# Altium PCB ECE8873_sample.PcbDoc
Units mm, origin at the board's own origin, x right, y up, seen from the top; angles counter-clockwise.
Board outline 17.79 x 10.55 mm, 2 copper layers (Top Layer, Bottom Layer); 4 components, 6 nets, 83 pads, 6 vias.
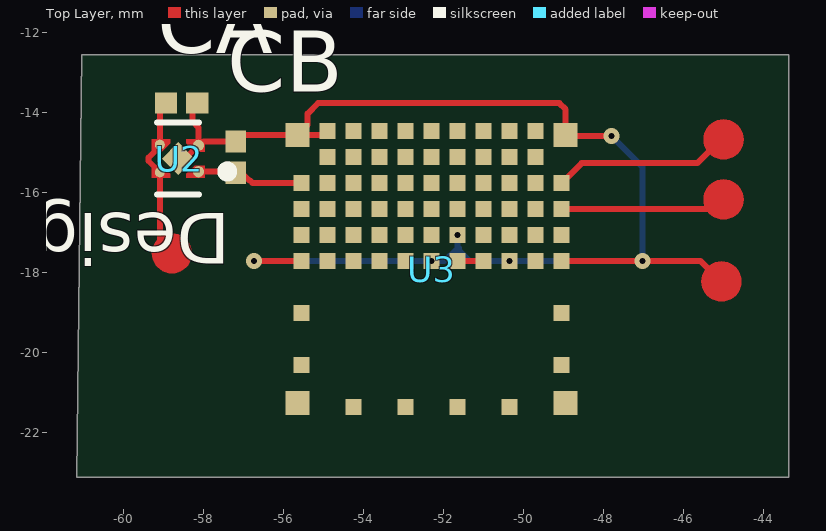
[diagram p0: Top Layer view]
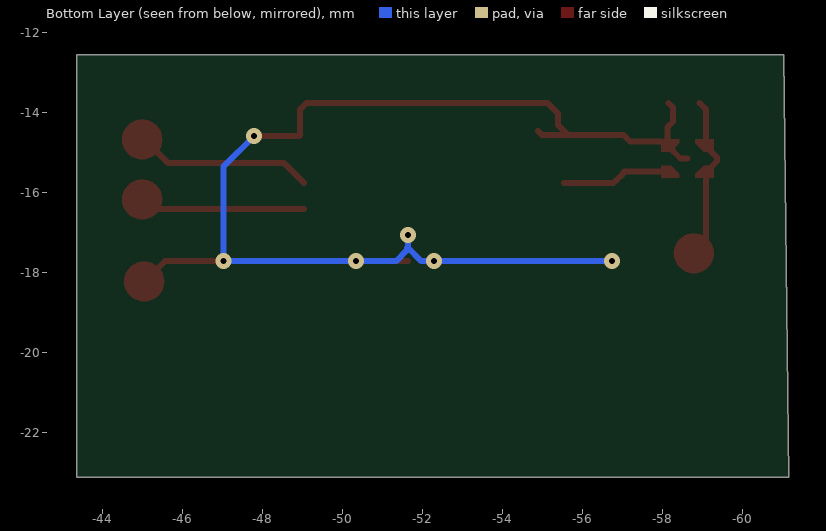
[diagram p1: Bottom Layer view, seen from below]
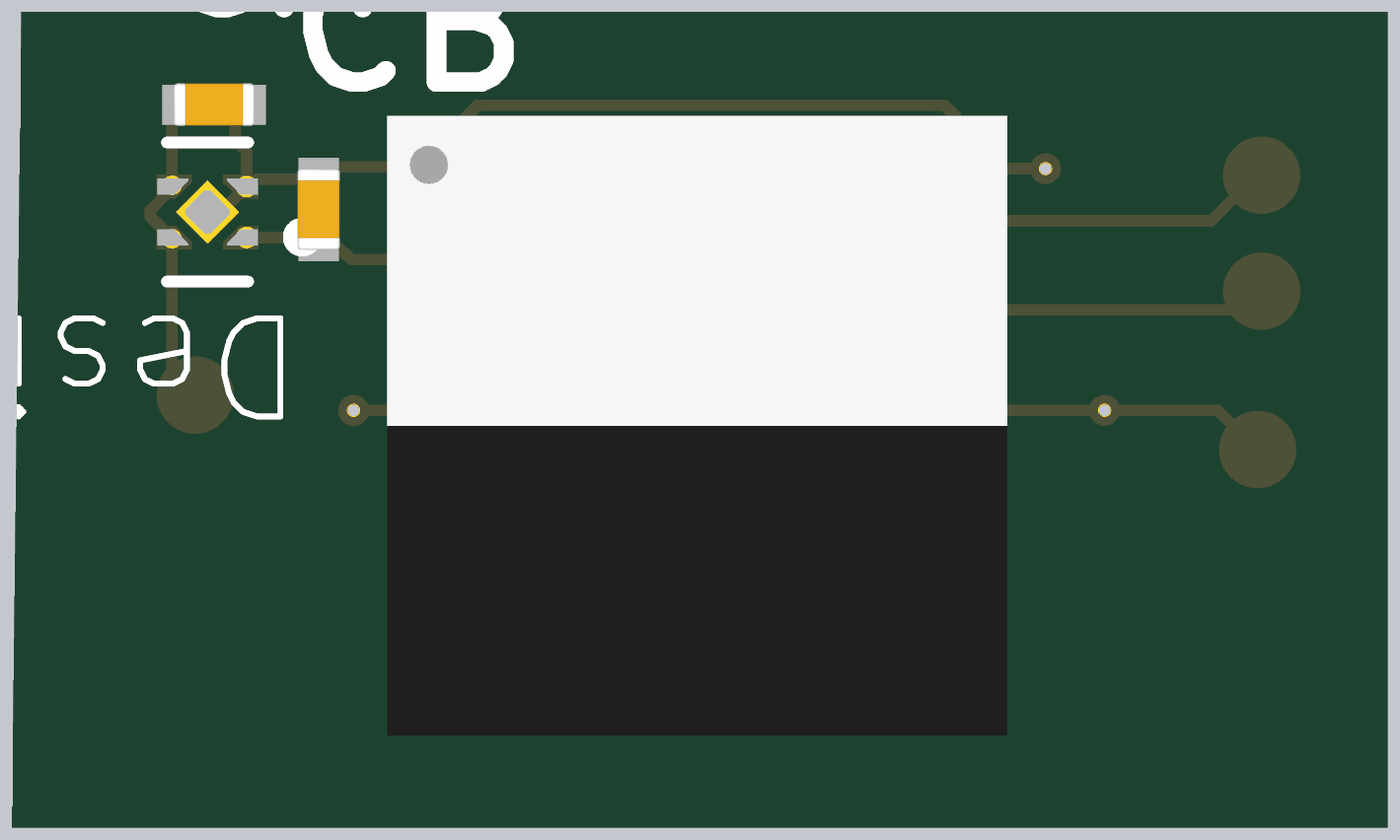
[diagram p2: 3D render of the assembled board from above, using the file's embedded part models]

## Layer stack, top to bottom
Top Solder: solder mask 0.0102, Solder Resist, Dk 3.5
Top Layer: signal copper 0.0356
Dielectric 1: dielectric 0.32, FR-4, Dk 4.8
Bottom Layer: signal copper 0.0356
Bottom Solder: solder mask 0.0102, Solder Resist, Dk 3.5

## Board outline
-61.161,-23.109 -43.368,-23.109 -43.368,-12.556 -61.038,-12.556

## Design rules (kind name [scope] priority, off if disabled: settings)
BoardOutlineClearance [All] p1: gap=0.2 ignorepadtopadclearanceinfootprint=FALSE
Clearance [All] p1: gap=0.12 ignorepadtopadclearanceinfootprint=TRUE
ComponentClearance [All] p1: gap=0.127 collisioncheckmode=3 verticalgap=0.127 showdistances=TRUE
DiffPairsRouting [All] p1: maxlimit=0.254 minlimit=0.127 mostfreqgap=0.127 toplayer_minwidth=0.127 toplayer_maxwidth=25.4 toplayer_prefwidth=0.127 bottomlayer_minwidth=0.127 bottomlayer_maxwidth=25.4 bottomlayer_prefwidth=0.127 maxuncoupledlength=12.7
Height [All] p1: minheight=0 maxheight=1816.048 prefheight=12.7
HoleSize [All] p1: absolutevalues=TRUE maxlimit=6.3 minlimit=0.15 maxpercent=80.000 minpercent=20.000
HoleToHoleClearance [All] p1: gap=0.254 allowstackedmicrovias=FALSE
MinimumAnnularRing [All] p1: minimumring=0.1
MinimumSolderMaskSliver [All] p1: minsoldermaskwidth=0.15
PlaneClearance [All] p1: clearance=0.127
PlaneConnect PlaneConnectPowerPads [InPadClass('PowerPads')] p1: planeconnectstyle=Direct reliefexpansion=0.508 reliefentries=4 reliefconductorwidth=0.254 reliefairgap=0.254
PlaneConnect [All] p2: pad.planeconnectstyle=Relief pad.reliefexpansion=0.3 pad.reliefentries=4 pad.reliefconductorwidth=0.127 pad.reliefairgap=0.127 via.planeconnectstyle=Direct via.reliefexpansion=0.3 via.reliefentries=4 via.reliefconductorwidth=0.127 via.reliefairgap=0.127
PolygonConnect PolygonConnectPowerPads [All vs (InPadClass('PowerPads'))] p1: connectstyle=Direct reliefconductorwidth=0.254 reliefentries=4 polygonreliefangle="90 Angle" airgapwidth=0.254
PolygonConnect [All] p2: thpad.connectstyle=Relief thpad.reliefconductorwidth=0.127 thpad.reliefentries=4 thpad.polygonreliefangle="90 Angle" thpad.airgapwidth=0.127 smdpad.connectstyle=Relief smdpad.reliefconductorwidth=0.127 smdpad.reliefentries=4 smdpad.polygonreliefangle="90 Angle" smdpad.airgapwidth=0.127 via.connectstyle=Direct via.reliefconductorwidth=0.127 via.reliefentries=4 via.polygonreliefangle="90 Angle" via.airgapwidth=0.127
RoutingVias [All] p1: holewidth=0.3 width=0.6 viastyle="Through Hole" minholewidth=0.3 minwidth=0.6 maxholewidth=0.6 maxwidth=6.6
SilkToSilkClearance [All] p1: silktosilkclearance=0.127
SilkToSolderMaskClearance [IsPad] p1: minsilkscreentomaskgap=0.127 clearancetoexposedcopper=TRUE
SolderMaskExpansion SolderMaskExpansion_1 [IsVia] p1: expansion=0.102 istentingtop=TRUE
SolderMaskExpansion [All] p2: expansion=0 istentingtop=FALSE
SupplyNets "Schematic Supply Nets" [InNet('GND')] p1: voltage=0.000
UnRoutedNet [All] p1: checkbadconnections=TRUE
Width Width_10mil [All] p1: maxlimit=25.4 minlimit=0.15 preferedwidth=0.15 minimp=50.000000 maximp=50.000000 favimp=50.000000
Width Width_6mil [All] p2: maxlimit=25.4 minlimit=0.152 preferedwidth=0.152 minimp=50.000000 maximp=50.000000 favimp=50.000000
Width Power_20mil [All] p3: maxlimit=25.4 minlimit=0.508 preferedwidth=0.508 minimp=50.000000 maximp=50.000000 favimp=50.000000
Width Power_12mil [All] p4: maxlimit=25.4 minlimit=0.305 preferedwidth=0.305 minimp=50.000000 maximp=50.000000 favimp=50.000000
Width Width_5mil [All] p5: maxlimit=25.4 minlimit=0.127 preferedwidth=0.127 minimp=50.000000 maximp=50.000000 favimp=50.000000
19 further rules are at their usual default settings.

## Components (designator, comment, footprint, x,y, rotation, side; value= is the part's Value field where it differs from the comment)
CA "Capacitor 1 uF +/- 10% 6.3 V 0402" CAPC1005X55X25LL05T10 -58.546,-13.755 r180 top value=1µF
CB "Capacitor 1 uF +/- 10% 6.3 V 0402" CAPC1005X55X25LL05T10 -57.193,-15.109 r270 top value=1µF
U2 "TPS7A0230PDQNR" DQN0004A-MFG -58.63,-15.144 r180 top
U3 "ISP1807" ISP2053-AX -52.297,-17.91 r0 top

## Footprints (in the part's own frame and the unit in brackets; to place one, negate y for a bottom-side part, rotate by r counter-clockwise, add the part's x,y. Pads: shape width x height; smd on the part's side, far side on the other; paste and mask are expansions set on the pad)
CAPC1005X55X25LL05T10 [mm] "Chip Capacitor, 2-Leads, Body 1.05x0.55mm, IPC High Density"
  rect 0.56x0.52 smd: 1(-0.39,0) 2(0.39,0)
  body extent -0.53,-0.28 0.53,0.28, height 0.55
DQN0004A-MFG [mm]
  round 0.279 smd paste-0.127: 1(-0.505,0.33) 2(-0.505,-0.33)
  round 0.251 smd paste-0.113: 3(0.459,-0.346) 4(0.459,0.346)
  rect 0.58x0.58 smd rot 135 paste-0.277: 5(0,0)
  Top Layer region: -0.66,0.175 -0.66,0.485 -0.2,0.485 -0.2,0.385 -0.41,0.175
  Top Layer region: 0.66,-0.175 0.66,-0.485 0.2,-0.485 0.2,-0.385 0.41,-0.175
  Top Layer region: 0.66,0.175 0.66,0.485 0.2,0.485 0.2,0.385 0.41,0.175
  Top Layer region: -0.66,-0.175 -0.66,-0.485 -0.2,-0.485 -0.2,-0.385 -0.41,-0.175
  silkscreen extent -1.35,-0.9 0.52,0.9
ISP2053-AX [mm] "Insight SiP BLE module all pins"
  rect 0.6x0.6 smd: A1(-3.35,3.35) A11(3.35,3.35) L1(-3.35,-3.35) L11(3.35,-3.35)
  rect 0.4x0.4 smd: A2(-2.6,3.45) A3(-1.95,3.45) A4(-1.3,3.45) A5(-0.65,3.45) A6(0,3.45) A7(0.65,3.45) A8(1.3,3.45) A9(1.95,3.45) A10(2.6,3.45) B2(-2.6,2.8) B3(-1.95,2.8) B4(-1.3,2.8) B5(-0.65,2.8) B6(0,2.8) B7(0.65,2.8) B8(1.3,2.8) B9(1.95,2.8) B10(2.6,2.8) C1(-3.25,2.15) C2(-2.6,2.15) C3(-1.95,2.15) C4(-1.3,2.15) C5(-0.65,2.15) C6(0,2.15) C7(0.65,2.15) C8(1.3,2.15) C9(1.95,2.15) C10(2.6,2.15) C11(3.25,2.15) D1(-3.25,1.5) D2(-2.6,1.5) D3(-1.95,1.5) D4(-1.3,1.5) D5(-0.65,1.5) D6(0,1.5) D7(0.65,1.5) D8(1.3,1.5) D9(1.95,1.5) D10(2.6,1.5) D11(3.25,1.5) E1(-3.25,0.85) E2(-2.6,0.85) E3(-1.95,0.85) E4(-1.3,0.85) E5(-0.65,0.85) E6(0,0.85) E7(0.65,0.85) E8(1.3,0.85) E9(1.95,0.85) E10(2.6,0.85) E11(3.25,0.85) F1(-3.25,0.2) F2(-2.6,0.2) F3(-1.95,0.2) F4(-1.3,0.2) F5(-0.65,0.2) F6(0,0.2) F7(0.65,0.2) F8(1.3,0.2) F9(1.95,0.2) F10(2.6,0.2) F11(3.25,0.2) H1(-3.25,-1.1) H11(3.25,-1.1) K1(-3.25,-2.4) K11(3.25,-2.4) L3(-1.95,-3.45) L5(-0.65,-3.45) L7(0.65,-3.45) L9(1.95,-3.45)
  body extent -4.01,-4.01 4.01,4.01, height 0.59

## Part data
CA CB: library part CMP-001-00008-6, "Chip Capacitor, 1 uF, +/- 10%, 6.3 V, 0402 (1005 Metric)", Capacitor Type=Ceramic, Case/Package=0402, Max Operating Temperature=85°C, Min Operating Temperature=-55°C, Tolerance=10%, Voltage Rating=6.3V, Mounting Technology=SM, Pins=2, RoHS Compliant=True
U2: "No Description Available", Mfr_Name="Texas Instruments", RefDes=RefDes, TYPE=TYPE
U3: library part ISP2053_Pinout_New, "ISP Smart Bluetooth Module", BOI="QFN 8 x 8", BOI-Metric="QFN 8 x 8", DESIG="BLE Module", FAB="Insight SiP", ISP_PART=ISP1807

## Via types
v1: diameter 0.4, hole 0.15, Top Layer to Bottom Layer, tented both sides, 6 vias

## Nets (pads, with @x,y where several pads share a name; then routed paths per layer and width w, separated by ;. In a path a pad name is that pad's centre, name@x,y a point inside that pad or via, vN(x,y) a via of type N, cw(c..) or ccw(c..) an arc to the next point about the centre after c; other vN are vias at no path point)
GND: CA.1 CB.1 U2.2 U2.5 U3.A1 U3.A2 U3.A11 U3.E7 U3.F1 U3.F6 U3.F9 U3.F11 | length 33.4
  Top Layer w0.15: U2.5 -58.455,-15.144 U2.2 ; CA.1 -58.271,-13.87 -58.271,-14.219 -58.125,-14.365 U2.2 ; v1(-56.742,-17.711) -55.548,-17.711 U3.F1 ; U3.A2 -54.997,-14.56 U3.A1 ; U3.F11 v1(-47.028,-17.71) -45.568,-17.71 -45.068,-18.21 ; v1(-47.793,-14.583) -48.924,-14.583 U3.A11 -48.947,-13.917 -49.102,-13.762 -55.135,-13.762 -55.397,-14.024 -55.397,-14.31 U3.A1 ; U2.2 -58.09,-14.814 -57.995,-14.719 CB.1 -57.034,-14.56 U3.A1
  Bottom Layer w0.15: v1(-56.742,-17.711) -56.741,-17.71 v1(-52.297,-17.71) -51.976,-17.71 -51.647,-17.381 v1(-51.647,-17.06) ; -51.616,-17.381 -51.616,-17.439 -51.345,-17.71 v1(-50.347,-17.71) v1(-47.028,-17.71) -47.028,-15.348 v1(-47.793,-14.583)
N$4: U3.F7 U3.F8 | length 0.7
  Top Layer w0.15: U3.F7 U3.F8
SWDCLK_1: U3.D11 | length 4.1
  Top Layer w0.15: U3.D11 -45.276,-16.41 -45.037,-16.171
SWDIO_1: U3.C11 | length 4.4
  Top Layer w0.15: U3.C11 -48.545,-15.258 -45.65,-15.258 -45.083,-14.691
VBAT1: CA.2 U2.3 U2.4 | length 4.4
  Top Layer w0.15: U2.3@-59.13,-14.798 -59.089,-14.839 -59.373,-15.123 -59.373,-15.206 U2.4 -59.089,-17.2 -58.803,-17.486 ; CA.2@-59.094,-13.913 CA.2 -59.089,-13.908 U2.3
VDD: CB.2 U2.1 U3.C1 | length 2.7
  Top Layer w0.15: U2.1 -57.054,-15.474 CB.2@-57.014,-15.514 ; CB.2@-57.014,-15.534 -56.854,-15.694 -56.834,-15.694 -56.768,-15.76 U3.C1
pads on no net: U3.A3 U3.A4 U3.A5 U3.A6 U3.A7 U3.A8 U3.A9 U3.A10 U3.B2 U3.B3 U3.B4 U3.B5 U3.B6 U3.B7 U3.B8 U3.B9 U3.B10 U3.C2 U3.C3 U3.C4 U3.C5 U3.C6 U3.C7 U3.C8 U3.C9 U3.C10 U3.D1 U3.D2 U3.D3 U3.D4 U3.D5 U3.D6 U3.D7 U3.D8 U3.D9 U3.D10 U3.E1 U3.E2 U3.E3 U3.E4 U3.E5 U3.E6 U3.E8 U3.E9 U3.E10 U3.E11 U3.F2 U3.F3 U3.F4 U3.F5 U3.F10 U3.H1 U3.H11 U3.K1 U3.K11 U3.L1 U3.L3 U3.L5 U3.L7 U3.L9 U3.L11

## Other copper
Top Layer:
  region net SWDCLK_1: -45.498,-16.167 cw(c-44.998,-16.167) -44.998,-15.667 cw(c-44.998,-16.167) -44.498,-16.167 cw(c-44.998,-16.167) -44.998,-16.667 cw(c-44.998,-16.167)
  region net VBAT1: -59.289,-17.513 cw(c-58.789,-17.513) -58.789,-17.013 cw(c-58.789,-17.513) -58.289,-17.513 cw(c-58.789,-17.513) -58.789,-18.013 cw(c-58.789,-17.513)
  region net GND: -45.549,-18.218 cw(c-45.049,-18.218) -45.049,-17.718 cw(c-45.049,-18.218) -44.549,-18.218 cw(c-45.049,-18.218) -45.049,-18.718 cw(c-45.049,-18.218)
  region net SWDIO_1: -45.498,-14.667 cw(c-44.998,-14.667) -44.998,-14.167 cw(c-44.998,-14.667) -44.498,-14.667 cw(c-44.998,-14.667) -44.998,-15.167 cw(c-44.998,-14.667)

## Text inside footprints (layer, text, board x,y; h text height)
U2: Top Overlay "Designator9" at -57.335,-16.516 h1.27 r180